# Altium PCB EST_MainV20.PcbDoc (part 6 of 8)
Units mm, origin at the board's own origin, x right, y up, seen from the top; angles counter-clockwise.
Board outline 69.72 x 115.32 mm, 2 copper layers (Top Layer, Bottom Layer); 330 components, 239 nets, 1066 pads, 416 vias.
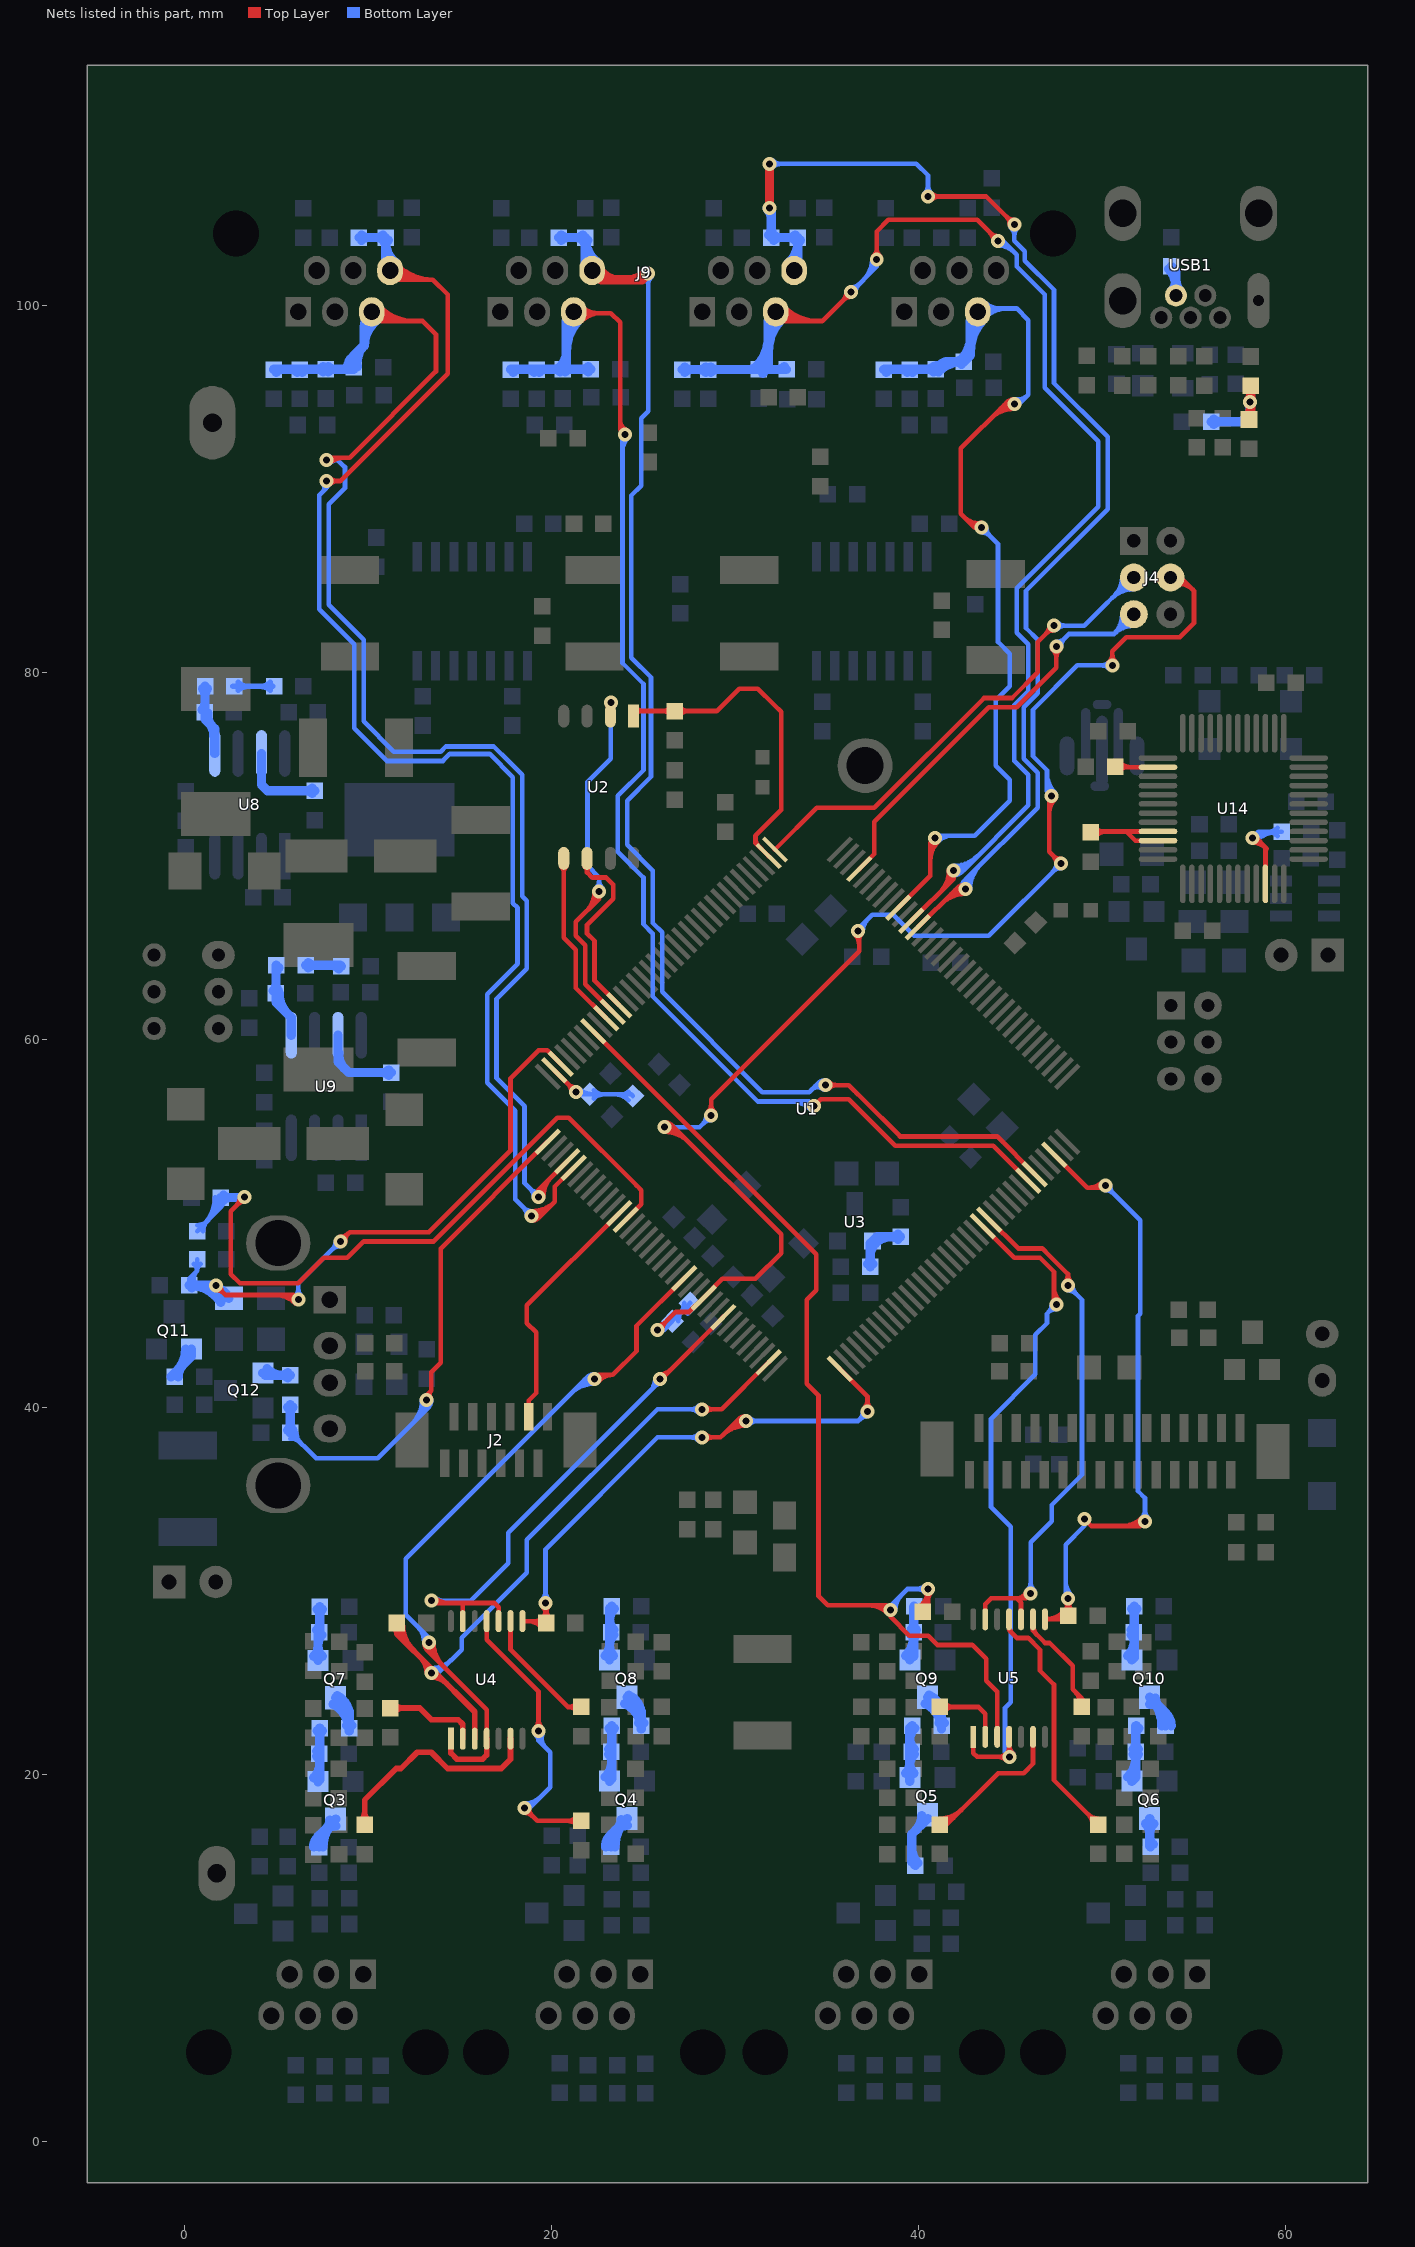
[diagram p6: the nets of this part, all layers, seen from the top]

## Via types
v1: diameter 0.762, hole 0.381, Top Layer to Bottom Layer, 258 vias
v2: diameter 1.27, hole 0.635, Top Layer to Bottom Layer, 91 vias
v3: diameter 1.016, hole 0.508, Top Layer to Bottom Layer, 66 vias
v4: diameter 1.524, hole 0.635, Top Layer to Bottom Layer, 1 vias

## Nets (pads, with @x,y where several pads share a name; then routed paths per layer and width w, separated by ;. In a path a pad name is that pad's centre, name@x,y a point inside that pad or via, vN(x,y) a via of type N, cw(c..) or ccw(c..) an arc to the next point about the centre after c; other vN are vias at no path point) (continued)
NetQ3_2: Q3.2 R13.2 R33.1 | length 5.5
  Bottom Layer w0.508: Q3.2@7.07,19.826 ccw(c6.283,20.613) 7.397,20.613 ; R13.2@7.233,20.987 cw(c6.837,20.591) 7.397,20.591 ; R13.2@7.233,21.264 ccw(c6.837,21.659) 7.397,21.659 ; R33.1@7.258,22.385 cw(c6.923,22.05) 7.397,22.05 cw(c7.87,22.05) R33.1@7.535,22.385 ; Q3.2@7.295,19.602 7.397,19.703 R33.1@7.397,22.523
NetQ3_3: Q3.3 R26.2 | length 6
  Bottom Layer w0.508: R26.2@7.059,16.045 cw(c7.841,16.045) 7.288,16.598 ; R26.2@7.233,16.184 ccw(c6.898,16.518) 7.371,16.518 ccw(c7.845,16.518) R26.2@7.51,16.184 ; R26.2@7.371,16.045 7.371,16.681 Q3.3@8.26,17.57 ; R26.2@7.567,16.045 cw(c9.575,16.045) Q3.3@8.155,17.465 ; 7.61,16.919 cw(c8.26,16.269) Q3.3@8.26,17.189 ; Q3.3@7.763,17.073 ccw(c7.329,17.506) Q3.3@7.943,17.506
NetQ4_2: Q4.2 R14.2 R34.1 | length 5.6
  Bottom Layer w0.508: Q4.2@22.94,19.859 ccw(c22.092,20.707) 23.292,20.707 ; R14.2@23.128,21.095 cw(c22.733,20.7) 23.292,20.7 ; R14.2@23.128,21.373 ccw(c22.733,21.768) 23.292,21.768 ; R34.1@23.153,22.519 cw(c22.819,22.184) 23.292,22.184 cw(c23.765,22.184) R34.1@23.43,22.519 ; Q4.2@23.165,19.634 23.292,19.761 R34.1@23.292,22.657
NetQ4_3: Q4.3 R28.2 | length 6.2
  Bottom Layer w0.508: R28.2@22.955,16.052 cw(c23.859,16.052) 23.219,16.692 ; R28.2@23.128,16.191 ccw(c22.793,16.526) 23.267,16.526 ccw(c23.74,16.526) R28.2@23.405,16.191 ; R28.2@23.267,16.052 23.267,16.739 Q4.3@24.13,17.602 ; R28.2@23.463,16.052 cw(c25.593,16.052) Q4.3@24.087,17.559 ; 23.48,16.952 cw(c24.13,16.301) Q4.3@24.13,17.221 ; Q4.3@23.633,17.105 ccw(c23.199,17.539) Q4.3@23.812,17.539
NetQ5_2: Q5.2 R15.2 R35.1 | length 6.3
  Bottom Layer w0.508: Q5.2@39.298,20.062 ccw(c38.756,20.604) 39.522,20.604 ccw(c40.289,20.604) Q5.2@39.747,20.062 ; Q5.2@39.522,19.634 39.522,22.53 R35.1@39.649,22.657 ; 39.522,20.515 cw(c40.343,20.515) R15.2@39.763,21.095 ; 39.522,21.877 cw(c40.429,21.877) R35.1@39.788,22.519 ; 39.522,21.953 ccw(c40.343,21.953) R15.2@39.763,21.373
NetQ5_3: Q5.3 R30.2 | length 4.8
  Bottom Layer w0.508: 39.624,16 ccw(c40.791,16) R30.2@39.966,15.175 ; R30.2@39.827,15.036 39.624,15.24 39.624,16.739 Q5.3@40.488,17.602 ; 39.847,16.961 ccw(c39.066,17.742) Q5.3@40.17,17.742
NetQ6_2: Q6.2 R16.2 R36.1 | length 6.2
  Bottom Layer w0.508: Q6.2@51.388,19.859 ccw(c50.355,20.892) R16.2@51.816,20.892 ; Q6.2@51.613,19.634 51.816,19.838 R16.2@51.816,21.234 51.816,22.632 R36.1@51.841,22.657 ; R16.2@51.678,21.095 cw(c51.343,20.761) 51.816,20.761 cw(c52.289,20.761) R16.2@51.955,21.095 ; R16.2@51.678,21.373 ccw(c51.343,21.707) 51.816,21.707 ccw(c52.289,21.707) R16.2@51.955,21.373 ; 51.816,22.123 cw(c52.375,22.123) R36.1@51.98,22.519
NetQ6_3: Q6.3 R32.2 | length 3.3
  Bottom Layer w0.508: Q6.3@52.353,17.314 cw(c51.811,16.772) 52.578,16.772 cw(c53.345,16.772) Q6.3@52.803,17.314 ; 52.578,16.649 ccw(c53.225,16.649) R32.2@52.768,16.191 ; Q6.3@52.578,17.602 52.578,16.103 R32.2@52.629,16.052
NetQ7_2: Q7.2 R21.1 R41.2 | length 5.9
  Bottom Layer w0.508: Q7.2@7.07,26.43 ccw(c6.528,26.972) 7.295,26.972 ccw(c8.061,26.972) Q7.2@7.519,26.43 ; R41.2@7.233,27.868 ccw(c6.837,28.263) 7.397,28.263 ; R21.1@7.258,28.989 cw(c6.923,28.654) 7.397,28.654 cw(c7.87,28.654) R21.1@7.535,28.989 ; Q7.2@7.295,26.206 7.295,27.653 R41.2@7.371,27.729 7.397,27.754 R21.1@7.397,29.127 ; 7.295,27.072 cw(c8.029,27.072) R41.2@7.51,27.591
NetQ7_3: Q7.3 R33.2 | length 7
  Bottom Layer w0.508: Q7.3@8.112,23.83 cw(c7.335,22.361) R33.2@8.997,22.361 ; Q7.3@8.26,23.793 cw(c8.26,22.873) 8.911,23.523 ; Q7.3@8.26,24.174 8.997,23.437 R33.2@8.997,22.523 ; Q7.3@8.349,24.279 cw(c7.781,23.204) 8.997,23.204 ; Q7.3@8.578,24.11 ccw(c9.191,24.11) Q7.3@8.757,23.677 ; R33.2@8.858,22.662 ccw(c8.523,22.996) 8.997,22.996 ccw(c9.47,22.996) R33.2@9.135,22.662
NetQ8_2: Q8.2 R22.1 R42.2 | length 6.2
  Bottom Layer w0.508: Q8.2@22.94,26.463 ccw(c22.398,27.005) 23.165,27.005 ccw(c23.931,27.005) Q8.2@23.389,26.463 ; Q8.2@23.165,26.238 23.165,29.033 R22.1@23.292,29.16 ; 23.165,27.017 cw(c23.986,27.017) R42.2@23.405,27.598 ; 23.165,28.38 cw(c24.072,28.38) R22.1@23.43,29.021 ; 23.165,28.455 ccw(c23.986,28.455) R42.2@23.405,27.875
NetQ8_3: Q8.3 R34.2 | length 6.9
  Bottom Layer w0.508: Q8.3@24,23.853 cw(c23.379,22.473) R34.2@24.892,22.473 ; Q8.3@24.13,23.825 cw(c24.13,22.905) 24.78,23.556 ; Q8.3@24.13,24.206 24.892,23.444 R34.2@24.892,22.657 ; Q8.3@24.208,24.316 cw(c23.732,23.259) 24.892,23.259 ; Q8.3@24.447,24.143 ccw(c25.061,24.143) Q8.3@24.627,23.709 ; R34.2@24.753,22.796 ccw(c24.419,23.13) 24.892,23.13 ccw(c25.365,23.13) R34.2@25.03,22.796
NetQ9_2: Q9.2 R23.1 R43.2 | length 6.1
  Bottom Layer w0.508: Q9.2@39.298,26.463 ccw(c38.265,27.496) R43.2@39.726,27.496 ; Q9.2@39.522,26.238 39.726,26.442 R43.2@39.726,27.736 39.726,29.134 R23.1@39.751,29.16 ; R43.2@39.587,27.598 cw(c39.253,27.263) 39.726,27.263 cw(c40.199,27.263) R43.2@39.864,27.598 ; R43.2@39.587,27.875 ccw(c39.253,28.21) 39.726,28.21 ccw(c40.199,28.21) R43.2@39.864,27.875 ; 39.726,28.626 cw(c40.285,28.626) R23.1@39.89,29.021
NetQ9_3: Q9.3 R35.2 | length 6.9
  Bottom Layer w0.508: Q9.3@40.357,23.853 cw(c39.736,22.473) R35.2@41.249,22.473 ; Q9.3@40.488,23.825 cw(c40.488,22.905) 41.138,23.556 ; Q9.3@40.488,24.206 41.249,23.444 R35.2@41.249,22.657 ; Q9.3@40.566,24.316 cw(c40.09,23.259) 41.249,23.259 ; Q9.3@40.805,24.143 ccw(c41.418,24.143) Q9.3@40.985,23.709 ; R35.2@41.111,22.796 ccw(c40.776,23.13) 41.249,23.13 ccw(c41.723,23.13) R35.2@41.388,22.796
NetQ10_2: Q10.2 R24.1 R44.2 | length 5.5
  Bottom Layer w0.508: Q10.2@51.388,26.463 ccw(c50.54,27.311) R44.2@51.74,27.311 ; R44.2@51.576,27.598 cw(c51.181,27.202) 51.74,27.202 ; R44.2@51.576,27.875 ccw(c51.181,28.27) 51.74,28.27 ; R24.1@51.601,29.021 cw(c51.267,28.686) 51.74,28.686 cw(c52.213,28.686) R24.1@51.878,29.021 ; Q10.2@51.613,26.238 51.74,26.365 R24.1@51.74,29.16
NetQ10_3: Q10.3 R36.2 | length 6.2
  Bottom Layer w0.508: Q10.3@52.578,23.825 cw(c52.578,22.905) 53.228,23.556 ; Q10.3@52.578,24.206 53.441,23.343 R36.2@53.441,22.657 ; Q10.3@52.622,24.162 cw(c51.117,22.657) R36.2@53.245,22.657 ; Q10.3@52.896,24.143 ccw(c53.509,24.143) Q10.3@53.075,23.709 ; R36.2@53.303,22.796 ccw(c52.968,23.13) 53.441,23.13 ccw(c53.915,23.13) R36.2@53.58,22.796 ; 53.489,23.295 cw(c52.851,22.657) R36.2@53.753,22.657
NetQ11_2: Q11.2 R154.2 | length 4
  Bottom Layer w0.508: R154.2@-0.711,41.656 0.406,42.773 Q11.2@0.406,43.155 ; R154.2@-0.405,41.961 ccw(c-1.599,43.155) Q11.2@0.089,43.155 ; R154.2@-0.312,41.656 cw(c0.652,41.656) -0.03,42.337
NetQ12_2: Q12.2 R157.1 | length 3.2
  Bottom Layer w0.508: Q12.2@4.293,41.859 4.42,41.732 R157.1@5.792,41.732 ; Q12.2@4.517,42.084 ccw(c5.366,42.932) R157.1@5.366,41.732 ; R157.1@5.653,41.594 ccw(c5.318,41.259) 5.318,41.732 ccw(c5.318,42.205) R157.1@5.653,41.871
NetR8_1: R8.1 R9.2 U3.1 | length 6.3
  Bottom Layer w0.508: R8.1@37.225,47.789 ccw(c36.89,48.123) 37.363,48.123 ccw(c37.837,48.123) R8.1@37.502,47.789 ; R8.1@37.363,47.65 37.363,48.92 37.719,49.276 R9.2@39.015,49.276 ; 37.363,48.25 cw(c38.288,48.25) 37.634,48.904 cw(c38.533,48.004) 38.533,49.276 ; R9.2@38.876,49.138 ccw(c38.542,48.803) 38.542,49.276 ccw(c38.542,49.749) R9.2@38.876,49.415
NetR11_2: R11.2 R12.1 U1.143 | length 9.1
  Top Layer w0.254: U1.143@20.159,58.341 v1(21.35,57.15) ; v1@21.096,57.15 ccw(c20.482,57.15) 20.916,57.584 ccw(c21.35,58.017) v1@21.35,57.404
  Bottom Layer w0.254: v1(21.35,57.15) 21.467,57.032 24.345,57.032 R12.1@24.433,56.944 ; v1@21.529,57.33 ccw(c22.247,58.047) R11.2@22.247,57.032 ; R11.2@22.311,56.804 cw(c22.862,56.253) 22.862,57.032 cw(c22.862,57.812) R11.2@22.311,57.261 ; 23.441,57.032 cw(c23.441,55.953) R12.1@24.205,56.716 ; 23.865,57.032 ccw(c23.865,57.512) R12.1@24.205,57.173
NetR65_2: R65.2 U4.6 | length 13.2
  Top Layer w0.305: R65.2@9.625,17.475 ccw(c9.117,17.983) 9.835,17.983 ccw(c10.553,17.983) R65.2@10.045,17.475 ; R65.2@9.835,17.265 9.835,18.598 11.557,20.32 11.811,20.32 12.7,21.209 13.462,21.209 14.351,20.32 14.986,20.32 17.272,20.32 17.779,20.827 U4.6@17.779,21.946
NetR66_2: R66.2 U4.11 | length 23.3
  Top Layer w0.254: U4.11@16.479,28.346 16.479,27.336 17.78,26.035 19.304,24.511 19.304,23.114 v1(19.304,22.352) ; v1@18.542,17.907 cw(c18.542,17.294) 18.976,17.727 cw(c19.409,18.161) v1@18.796,18.161 ; v1(18.542,18.161) 19.228,17.475 R66.2@21.641,17.475 ; v1@19.124,22.532 ccw(c18.691,22.965) 19.304,22.965 ccw(c19.917,22.965) v1@19.484,22.532 ; R66.2@21.413,17.247 ccw(c20.861,16.695) 20.861,17.475 ccw(c20.861,18.255) R66.2@21.413,17.703
  Bottom Layer w0.254: v1@18.542,18.415 ccw(c18.542,19.641) 19.409,18.774 ; 18.976,18.341 cw(c18.542,18.774) v1(18.542,18.161) 18.796,18.161 19.939,19.304 19.939,21.209 19.304,21.844 ; 19.422,21.726 cw(c19.821,22.125) v1(19.304,22.352) 19.304,21.844 ; v1@19.537,22.25 ccw(c20.187,21.965) 19.685,21.463 ; 19.304,21.844 cw(c19.685,21.844) 19.456,22.149 ccw(c19.685,21.844) 19.304,21.844 ; 19.304,21.844 ccw(c18.923,21.844) 19.152,22.149 cw(c18.923,21.844) 19.304,21.844
NetR67_2: R67.2 U5.6 | length 10.1
  Top Layer w0.254: R67.2@41.148,17.272 41.529,17.272 44.323,20.066 45.719,20.066 46.227,20.574 U5.6@46.227,22.047 ; R67.2@41.148,17.341 ccw(c41.148,18.426) 41.916,17.659 ; R67.2@41.148,17.595 ccw(c41.148,19.293) 42.349,18.092
NetR68_2: R68.2 U5.11 | length 15.2
  Top Layer w0.254: U5.11@44.927,28.447 44.927,27.844 45.339,27.432 45.974,27.432 46.609,26.797 46.609,25.654 47.371,24.892 47.371,19.685 R68.2@49.784,17.272 ; U5.11@44.96,28.007 ccw(c45.433,28.007) 45.098,27.673 ; R68.2@49.461,17.272 ccw(c48.682,17.272) 49.233,17.823 ccw(c49.784,18.375) R68.2@49.784,17.595
NetR78_2: R78.2 U5.9 | length 8.4
  Top Layer w0.254: U5.9@46.227,28.447 46.227,27.814 46.884,27.157 47.138,27.157 48.387,25.908 48.387,24.638 48.87,24.155 ; U5.9@46.26,28.007 ccw(c46.806,28.007) 46.42,27.621 ; 48.515,24.51 cw(c47.806,23.801) R78.2@48.802,23.681 ; R78.2@48.747,23.971 ccw(c48.671,24.155) 48.87,24.155 ; R78.2@48.87,23.673 48.87,24.155 ; 48.884,24.141 cw(c48.465,23.721) R78.2@49.054,23.65 ; R78.2@48.993,23.971 cw(c49.069,24.155) 48.87,24.155
NetR80_2: R80.2 U4.2 | length 6.2
  Top Layer w0.305: R80.2@11.232,23.615 12.827,23.615 12.834,23.615 13.462,22.987 14.925,22.987 15.179,22.733 U4.2@15.179,21.946 ; R80.2@11.442,23.404 cw(c11.95,22.896) 11.95,23.615 cw(c11.95,24.333) R80.2@11.442,23.825
NetR82_2: R82.2 U4.9 | length 7.8
  Top Layer w0.254: U4.9@17.779,28.346 17.779,26.798 20.904,23.673 ; R82.2@21.404,23.454 ccw(c20.904,22.994) 20.904,23.673 ; R82.2@21.404,23.891 cw(c20.904,24.351) 20.904,23.673 ; R82.2@21.641,23.673 20.904,23.673
NetR84_2: R84.2 U5.2 | length 5.1
  Top Layer w0.254: R84.2@41.148,23.673 43.256,23.673 43.627,23.302 U5.2@43.627,22.047 ; R84.2@41.377,23.444 cw(c41.928,22.893) 41.928,23.673 cw(c41.928,24.452) R84.2@41.377,23.901
NetR133_2: R133.2 U8.7 | length 5.5
  Bottom Layer w0.508: U8.7@4.216,75.59 4.216,73.889 4.547,73.558 R133.2@7.112,73.558 ; R133.2@6.973,73.42 ccw(c6.638,73.085) 6.638,73.558 ccw(c6.638,74.031) R133.2@6.973,73.697
NetR134_2: R134.2 U9.7 | length 6.2
  Bottom Layer w0.508: U9.7@8.382,60.249 8.382,58.801 8.966,58.217 R134.2@11.277,58.217 ; U9.7@8.433,59.279 ccw(c9.444,59.177) 8.725,58.458 ; R134.2@11.139,58.078 ccw(c10.804,57.743) 10.804,58.217 ccw(c10.804,58.69) R134.2@11.139,58.355
NetR135_1: R135.1 R136.2 | length 4.4
  Bottom Layer w0.305: R136.2@2.667,79.248 R135.1@4.826,79.248 ; R136.2@2.953,79.038 cw(c3.46,78.531) 3.46,79.248 ; R136.2@2.953,79.459 ccw(c3.462,79.968) 3.462,79.248 ; 4.183,79.248 ccw(c4.183,79.968) R135.1@4.692,79.459 ; 4.185,79.248 cw(c4.185,78.531) R135.1@4.692,79.038
NetR136_1: R136.1 R139.2 U8.5 | length 6.6
  Bottom Layer w0.508: R139.2@0.979,77.964 ccw(c0.584,78.359) 1.143,78.359 ; R136.1@1.004,79.11 cw(c0.67,78.775) 1.143,78.775 cw(c1.616,78.775) R136.1@1.282,79.11 ; R136.1@1.143,79.248 1.143,77.47 1.676,76.937 U8.5@1.676,75.59 ; R139.2@1.309,77.784 ccw(c2.038,77.629) 1.511,77.102 ; 1.32,77.293 cw(c0.583,76.556) U8.5@1.626,76.556
NetR137_1: R137.1 R138.2 | length 5.9
  Bottom Layer w0.508: R138.2@6.629,64.059 8.509,64.059 R137.1@8.56,64.008 ; R138.2@6.934,64.059 R137.1@8.382,64.059 ; 7.102,64.059 cw(c7.102,64.532) 6.768,64.198 ccw(c7.102,64.532) 7.102,64.059 ; 7.102,64.059 ccw(c7.102,63.586) 6.768,63.921 cw(c7.102,63.586) 7.102,64.059 ; 7.964,64.059 cw(c7.964,63.413) 8.421,63.87 ccw(c7.964,63.413) 7.964,64.059
NetR138_1: R138.1 R140.2 U9.5 | length 6.5
  Bottom Layer w0.508: R140.2@4.865,62.673 ccw(c4.531,63.008) 5.004,63.008 ccw(c5.477,63.008) R140.2@5.143,62.673 ; 5.004,63.525 cw(c5.563,63.525) R138.1@5.168,63.921 ; R138.1@5.029,64.059 5.004,64.034 5.004,62.052 5.842,61.214 U9.5@5.842,60.249 ; R140.2@5.2,62.522 ccw(c6.577,62.431) 5.601,61.455
NetR144_1: R144.1 R147.2 R152.2 | length 8.3
  Top Layer w0.508: R147.2@57.85,93.915 ccw(c57.272,94.493) v1@58.089,94.493 ; v1@57.949,94.652 cw(c57.611,94.314) 58.089,94.314 ; v1@57.949,94.832 ccw(c57.611,95.17) R152.2@58.089,95.17 ; R152.2@57.951,95.467 cw(c57.616,95.133) 58.089,95.133 cw(c58.563,95.133) R152.2@58.228,95.467 ; R147.2@57.989,93.878 58.089,93.979 R152.2@58.089,95.606
  Bottom Layer w0.508: R144.1@55.935,93.652 57.584,93.652 58.039,94.107 v1(58.039,94.742) ; R144.1@56.073,93.514 cw(c56.408,93.179) 56.408,93.652 cw(c56.408,94.126) R144.1@56.073,93.791 ; 57.902,93.97 ccw(c57.534,94.337) v1@57.94,94.663
NetR150_2: R150.2 USB1.4 | length 4.1
  Bottom Layer w0.508: R150.2@53.608,101.97 cw(c52.638,101) USB1.4@54.01,101 ; R150.2@53.747,102.108 54.01,101.845 USB1.4@54.01,100.527 ; USB1.4@53.765,100.771 ccw(c53.175,101.362) 54.01,101.362 ccw(c54.845,101.362) USB1.4@54.255,100.771 ; USB1.4@53.975,100.457 USB1.4@53.975,100.527
NetR165_2: R165.2 U14.26 | length 3.6
  Top Layer w0.254: R165.2@50.698,74.879 50.734,74.843 U14.26@53.033,74.843 ; R165.2@50.927,74.65 cw(c51.393,74.184) 51.393,74.843 ; R165.2@50.927,75.107 ccw(c51.563,75.744) 51.563,74.843
NetR167_1: R167.1 U14.33 U14.34 | length 6.8
  Top Layer w0.254: R167.1@49.377,71.298 49.423,71.343 51.308,71.343 ; R167.1@49.606,71.069 cw(c50.267,70.408) 50.267,71.343 ; R167.1@49.606,71.526 ccw(c50.047,71.967) 50.047,71.343 ; U14.34@53.033,70.843 51.808,70.843 51.308,71.343 ; U14.33@53.033,71.343 51.308,71.343
NetR168_1: R168.1 U14.46 | length 9.4
  Top Layer w0.254: v1@58.166,70.739 cw(c58.166,69.622) 58.956,70.412 ; 58.522,70.845 ccw(c58.166,70.489) v1(58.166,70.993) 58.375,70.993 58.883,70.485 U14.46@58.883,68.493
  Bottom Layer w0.254: v1@58.346,70.813 cw(c59.577,69.582) R168.1@59.577,71.324 ; 58.964,71.324 ccw(c58.964,70.195) v1(58.166,70.993) 58.497,71.324 R168.1@59.766,71.324 ; R168.1@59.538,71.095 ccw(c58.986,70.544) 58.986,71.324 ccw(c58.986,72.103) R168.1@59.538,71.552
PB_CON: R157.2 R160.2 U1.1 | length 34.7
  Top Layer w0.254: v1@13.018,40.45 13.462,40.894 ; v1@13.422,40.523 cw(c13.672,40.684) 13.462,40.894 ; U1.1@19.805,54.452 19.788,54.452 13.97,48.634 13.97,42.418 13.462,41.91 13.462,40.894
  Bottom Layer w0.254: R160.2@5.791,38.285 cw(c5.791,37.506) 6.342,38.057 cw(c6.894,38.608) R160.2@6.114,38.608 ; R160.2@5.791,38.608 7.188,37.211 10.541,37.211 13.208,39.878 ; 12.415,39.085 ccw(c11.114,40.386) v1@12.954,40.386 ; 12.849,39.519 ccw(c11.982,40.386) v1(13.208,40.386) 13.208,39.878 ; v1@13.056,40.183 cw(c12.827,39.878) 13.208,39.878 ; 13.282,39.952 ccw(c12.849,40.386) v1@13.462,40.386 ; v1@13.36,40.183 ccw(c13.589,39.878) 13.208,39.878
  Bottom Layer w0.508: R160.2@5.652,38.747 ccw(c5.318,39.082) 5.791,39.082 ccw(c6.264,39.082) R160.2@5.93,38.747 ; R157.2@5.653,39.994 cw(c5.32,39.66) 5.791,39.66 ; R160.2@5.791,38.608 R157.2@5.792,40.132 ; 5.791,39.658 cw(c6.266,39.658) R157.2@5.93,39.994
PB_DET: D11.1 R155.1 R158.2 U1.142 | length 43.9
  Top Layer w0.254: v1@1.728,46.38 cw(c1.728,45.767) 2.161,46.2 cw(c2.595,46.634) v1@1.982,46.634 ; v1(1.728,46.634) 2.261,46.101 5.969,46.101 v1(6.223,45.847) ccw(c5.61,45.234) 5.61,46.101 ; 4.997,46.101 cw(c4.997,44.621) v1@6.043,45.667 ; v1(8.509,49.022) 9.017,49.53 13.335,49.53 17.78,53.975 17.78,57.912 19.304,59.436 19.771,59.436 U1.142@20.512,58.694 ; v1@8.509,49.276 ccw(c8.509,49.889) 8.943,49.456 ccw(c9.376,49.022) v1@8.763,49.022
  Bottom Layer w0.254: R155.1@0.279,46.634 0.279,46.99 0.711,47.422 ; R155.1@0.343,46.66 cw(c0.762,46.832) 0.442,47.152 ; R158.2@0.521,47.795 cw(c0.25,47.422) 0.711,47.422 ; R155.1@0.578,46.757 cw(c1.144,46.989) 0.711,47.422 ; R158.2@0.711,48.056 0.711,47.422 ; R158.2@0.901,47.795 ccw(c1.173,47.422) 0.711,47.422 ; v1@6.043,46.027 ccw(c5.61,46.46) 6.223,46.46 ccw(c6.836,46.46) v1@6.403,46.027 ; v1(6.223,45.847) 6.223,46.736 v1(8.509,49.022) ; v1@8.255,49.022 cw(c7.642,49.022) 8.075,48.588 cw(c8.509,48.155) v1@8.509,48.768
  Bottom Layer w0.508: R155.1@0.418,46.495 cw(c0.753,46.161) 0.753,46.634 cw(c0.753,47.107) R155.1@0.418,46.773 ; 1.225,46.634 cw(c1.225,45.204) D11.1@2.417,45.993 ; D11.1@1.994,45.713 ccw(c0.279,44.578) R155.1@0.279,46.634 v1(1.728,46.634) D11.1@2.438,45.923
PB_VOL: R156.1 R159.2 U1.13 | length 44.5
  Top Layer w0.254: v1@3.048,51.435 cw(c2.435,51.435) 2.868,51.001 cw(c3.302,50.568) v1@3.302,51.181 ; v1(3.302,51.435) 2.54,50.673 2.54,47.244 3.048,46.736 6.223,46.736 7.62,48.133 8.89,48.133 9.779,49.022 13.589,49.022 20.32,55.753 20.955,55.753 24.638,52.07 24.892,51.816 24.892,51.053 U1.13@24.048,50.209
  Bottom Layer w0.254: R159.2@0.711,49.58 2.007,50.876 R156.1@2.007,51.409 ; R159.2@0.711,49.903 ccw(c0.711,50.683) 1.263,50.132 ccw(c1.814,49.58) R159.2@1.034,49.58 ; R159.2@1.078,49.947 ccw(c-0.384,51.409) R156.1@1.684,51.409 ; 1.511,50.38 ccw(c0.483,51.409) R156.1@1.938,51.409 ; 1.945,50.814 ccw(c1.35,51.409) R156.1@2.192,51.409
  Bottom Layer w0.508: R156.1@2.007,51.283 R156.1@2.007,51.409 3.276,51.409 v1(3.302,51.435) ; R156.1@2.145,51.271 cw(c2.48,50.936) 2.48,51.409 cw(c2.48,51.882) R156.1@2.145,51.548
RED: J2.3 U1.12 | length 14.5
  Top Layer w0.254: J2.3@18.684,40.059 ccw(c18.474,40.269) 18.771,40.269 ccw(c19.068,40.269) J2.3@18.858,40.059 ; J2.3@18.771,38.964 J2.3@18.771,39.472 18.771,40.361 19.177,40.767 19.177,44.069 18.669,44.577 18.669,45.537 U1.12@23.694,50.563
RST: C8.2 J4.4 R5.1 U1.25 | length 97.2
  Top Layer w0.254: v1(25.781,44.196) 26.768,45.183 27.507,45.183 U1.25@28.29,45.966 29.314,46.99 31.115,46.99 32.512,48.387 32.512,49.403 26.67,55.245 ; v1@25.781,44.45 ccw(c25.781,45.063) 26.215,44.63 ccw(c26.648,44.196) v1@26.035,44.196 ; v1@26.162,54.991 cw(c26.162,53.151) 27.463,54.452 ; v1@26.162,55.499 cw(c26.162,54.886) 26.596,55.319 ; v1@26.311,55.039 cw(c26.589,54.656) 26.924,54.991 ; v1@26.365,55.093 cw(c26.67,54.864) 26.67,55.245 ; v1@26.365,55.397 ccw(c26.67,55.626) 26.67,55.245 ; 26.714,55.201 ccw(c26.412,54.9) v1(26.162,55.245) ; 27.029,54.886 ccw(c26.162,54.019) v1(26.162,55.245) ; v1@28.522,56.06 ccw(c28.089,56.493) 28.702,56.493 ccw(c29.315,56.493) v1@28.882,56.06 ; v1(28.702,55.88) 28.702,56.769 36.767,64.834 v1@36.767,65.849 ; v1@36.523,65.733 cw(c35.936,65.146) 36.767,65.146 ; 36.767,65.453 cw(c37.163,65.453) v1@36.883,65.733 ; 47.117,72.359 cw(c48.164,72.359) v1@47.424,73.099 ; v1@47.117,73.152 47.117,70.231 v1(47.752,69.596) ; v1@47.498,69.596 ccw(c46.885,69.596) 47.318,70.03 ccw(c47.752,70.463) v1@47.752,69.85 ; v1@50.366,80.571 ccw(c49.933,81.004) 50.546,81.004 ccw(c51.159,81.004) v1@50.726,80.571 ; v1(50.546,80.391) 50.546,81.153 51.308,81.915 54.229,81.915 54.991,82.677 54.991,84.455 54.273,85.173 J4.4@53.714,85.173 ; J4.4@53.746,85.05 cw(c53.979,84.143) 54.641,84.805 ; J4.4@53.809,84.804 cw(c54.108,83.643) 54.956,84.49 ; v1(26.162,55.245) 26.67,55.245
  Bottom Layer w0.254: v1@25.832,44.445 ccw(c25.999,45.263) R5.1@26.59,44.673 ; v1(26.162,55.245) 28.067,55.245 v1(28.702,55.88) ; 26.256,44.339 cw(c25.886,44.709) v1(25.781,44.196) 26.114,44.196 R5.1@26.59,44.673 ; v1@26.342,55.065 cw(c26.775,54.632) 26.775,55.245 cw(c26.775,55.858) v1@26.342,55.425 ; R5.1@26.59,44.996 ccw(c26.59,45.699) 27.088,45.202 ; R5.1@26.913,44.673 cw(c27.769,44.673) 27.164,45.278 ; C8.2@27.232,45.669 cw(c26.452,45.669) 27.003,45.117 cw(c27.555,44.566) C8.2@27.555,45.346 ; 27.298,45.219 27.432,45.085 ; C8.2@27.555,45.669 26.59,44.704 R5.1@26.59,44.673 ; v1@28.448,55.88 cw(c27.835,55.88) 28.268,55.446 cw(c28.702,55.013) v1@28.702,55.626 ; v1(36.703,65.913) 36.703,66.04 37.465,66.802 38.608,66.802 39.751,65.659 43.815,65.659 v1(47.752,69.596) ; v1@36.703,66.167 ccw(c36.703,66.474) 36.92,66.257 ; v1@36.957,65.913 cw(c37.877,65.913) 37.226,66.563 ; 46.99,73.892 ccw(c47.857,73.892) v1(47.244,73.279) 46.99,73.533 46.99,74.676 46.228,75.438 46.228,77.978 48.641,80.391 v1(50.546,80.391) ; 46.99,74.505 ccw(c48.47,74.505) v1@47.424,73.459 ; v1@47.498,69.596 cw(c46.885,69.596) 47.318,69.162 cw(c47.752,68.729) v1@47.752,69.342 ; v1@50.366,80.211 ccw(c49.933,79.778) 49.933,80.391 ccw(c49.933,81.004) v1@50.366,80.571
RXINA: R74.2 U1.35 U4.3 | length 45
  Top Layer w0.254: v1(28.194,39.878) 29.273,39.878 U1.35@31.826,42.431 ; v1@28.374,39.698 cw(c28.807,39.265) 28.807,39.878 cw(c28.807,40.491) v1@28.374,40.058
  Top Layer w0.305: R74.2@11.575,28.245 ccw(c12.97,28.245) 11.984,27.259 ; R74.2@11.583,28.245 11.583,27.66 ; R74.2@11.88,28.245 ccw(c14.011,28.245) 12.504,26.739 ; 12.892,26.351 cw(c12.068,25.527) v1@13.233,25.527 ; v1@13.462,25.298 cw(c13.462,24.133) 14.286,24.957 ; v1@13.462,25.654 v1@13.525,25.717 ; U4.3@15.829,21.946 15.829,23.414 v1@13.525,25.717 ; 11.583,27.66 cw(c12.008,27.66) 11.758,28.005 ccw(c12.008,27.66) 11.583,27.66 ; 11.583,27.66 ccw(c11.157,27.66) 11.407,28.005 cw(c11.157,27.66) 11.583,27.66 ; 11.583,27.66 v1@13.525,25.717
  Bottom Layer w0.254: v1@13.462,25.781 ccw(c13.462,27.314) 14.546,26.23 ; 14.112,25.796 cw(c13.462,26.447) v1(13.462,25.527) 13.843,25.527 15.113,26.797 15.113,27.432 18.669,30.988 18.669,32.766 25.781,39.878 v1(28.194,39.878) ; v1@28.014,39.698 ccw(c27.581,39.265) 27.581,39.878 ccw(c27.581,40.491) v1@28.014,40.058
RXINA_EN: U1.22 U4.1 U4.4 | length 49.9
  Top Layer w0.254: v1@13.081,27.178 ccw(c13.694,27.178) 13.261,26.744 ; v1@13.589,27.178 ccw(c15.429,27.178) 14.128,25.877 ; 13.694,26.311 cw(c14.561,27.178) v1(13.335,27.178) 13.335,26.67 ; U4.4@16.479,21.946 16.479,23.526 13.335,26.67 ; v1@22.552,41.372 cw(c23.341,40.753) 23.341,41.756 ; 22.819,41.756 ccw(c22.819,41.163) v1(22.352,41.529) 22.579,41.756 23.341,41.756 ; U1.22@27.23,47.027 24.638,44.435 24.638,43.053 23.341,41.756 ; 13.335,26.67 cw(c13.716,26.67) 13.487,26.975 ccw(c13.716,26.67) 13.335,26.67 ; 13.335,26.67 ccw(c12.954,26.67) 13.183,26.975 cw(c12.954,26.67) 13.335,26.67
  Top Layer w0.305: U4.1@14.529,21.946 14.529,21.158 14.859,20.828 16.256,20.828 16.479,21.051 U4.4@16.479,21.946
  Bottom Layer w0.254: 12.722,28.045 cw(c11.855,27.178) v1@13.081,27.178 ; 13.155,27.612 cw(c12.722,27.178) v1(13.335,27.178) 13.335,27.432 12.065,28.702 12.065,31.75 21.844,41.529 ; 21.051,40.736 cw(c22.352,39.435) v1@22.352,41.275 ; 21.485,41.17 cw(c22.352,40.303) v1(22.352,41.529) ; 21.59,41.275 cw(c21.925,40.94) v1@22.203,41.323 ; 21.8,41.485 cw(c22.102,41.184) v1(22.352,41.529) ; 21.918,41.603 cw(c22.352,41.17) v1@22.352,41.783 ; v1@22.149,41.377 ccw(c21.844,41.148) 21.844,41.529 ; v1@22.149,41.681 cw(c21.844,41.91) 21.844,41.529 ; 21.844,41.529 v1(22.352,41.529)
RXINB: R75.2 U1.37 U4.8 | length 43
  Top Layer w0.254: U4.8@18.429,28.346 18.669,28.346 19.61,28.346 R75.2@19.711,28.245 19.711,29.311 v1(19.685,29.337) ; 18.688,28.346 cw(c18.688,27.223) R75.2@19.482,28.017 ; 19.173,28.346 ccw(c19.173,28.783) 19.482,28.474 ccw(c18.931,29.025) 19.711,29.025 ccw(c20.49,29.025) R75.2@19.939,28.474 ; v1@19.505,29.157 cw(c19.01,28.662) R75.2@19.711,28.662 ; 19.711,28.786 cw(c20.236,28.786) v1@19.865,29.157 ; v1(28.194,38.354) 29.21,38.354 30.099,39.243 ; v1@28.374,38.174 cw(c28.807,37.741) 28.807,38.354 cw(c28.807,38.967) v1@28.374,38.534 ; 29.306,38.45 cw(c30.607,37.149) v1@30.607,38.989 ; 29.74,38.884 cw(c30.607,38.017) v1(30.607,39.243) ; 29.845,38.989 cw(c30.18,38.654) v1@30.458,39.037 ; 30.055,39.199 cw(c30.357,38.898) v1(30.607,39.243) ; 30.173,39.317 cw(c30.607,38.884) v1@30.607,39.497 ; v1@30.404,39.091 ccw(c30.099,38.862) 30.099,39.243 ; v1@30.404,39.395 cw(c30.099,39.624) 30.099,39.243 ; U1.37@35.715,42.077 37.211,40.581 v1(37.211,39.751) ; v1@37.031,39.931 ccw(c36.598,40.364) 37.211,40.364 ccw(c37.824,40.364) v1@37.391,39.931 ; 30.099,39.243 v1(30.607,39.243)
  Bottom Layer w0.254: v1@19.505,29.517 ccw(c19.072,29.95) 19.685,29.95 ccw(c20.298,29.95) v1@19.865,29.517 ; v1(19.685,29.337) 19.685,32.258 25.781,38.354 v1(28.194,38.354) ; v1@28.014,38.174 ccw(c27.581,37.741) 27.581,38.354 ccw(c27.581,38.967) v1@28.014,38.534 ; v1(30.607,39.243) 36.703,39.243 v1(37.211,39.751) ; v1@30.787,39.063 cw(c31.22,38.63) 31.22,39.243 cw(c31.22,39.856) v1@30.787,39.423 ; v1@36.957,39.751 cw(c36.344,39.751) 36.777,39.317 cw(c37.211,38.884) v1@37.211,39.497
RXINB_EN: U1.28 U4.10 U4.13 | length 32.4
  Top Layer w0.254: v1(13.462,29.464) 13.589,29.337 15.179,29.337 ; v1@13.642,29.644 ccw(c14.382,30.384) 14.382,29.337 ; U4.13@15.179,28.346 15.179,29.337 ; U4.10@17.129,28.346 17.129,29.099 16.891,29.337 15.179,29.337 ; v1@25.908,41.783 ccw(c25.908,42.557) 26.455,42.01 ; v1@25.974,41.529 U1.28@29.351,44.906 ; v1@26.162,41.529 cw(c26.615,41.529) 26.295,41.849
  Bottom Layer w0.254: v1(13.462,29.464) 15.621,29.464 17.653,31.496 17.653,33.147 22.86,38.354 v1@25.908,41.402 ; v1@13.642,29.284 cw(c14.075,28.851) 14.075,29.464 cw(c14.075,30.077) v1@13.642,29.644 ; 25.385,40.879 ccw(c24.734,41.529) v1@25.654,41.529 ; 25.691,41.185 cw(c25.908,40.968) v1@25.908,41.275
  other v1: 25.908,41.529
RXINC: R76.2 U1.137 U5.3 | length 62.5
  Top Layer w0.254: U1.137@22.28,60.462 34.417,48.325 34.417,46.355 33.909,45.847 33.909,41.275 34.544,40.64 34.544,29.718 35.052,29.21 38.227,29.21 v1(38.481,28.956) ; 37.255,29.21 cw(c37.255,27.73) v1@38.301,28.776 ; 37.868,29.21 cw(c37.868,28.343) v1(38.481,28.956) ; R76.2@40.033,29.108 ccw(c39.25,30.099) v1(40.513,30.099) 40.513,29.134 R76.2@40.234,28.855 ; R76.2@40.191,28.909 ccw(c39.665,29.574) 40.513,29.574 ; v1@40.333,29.919 cw(c39.9,29.486) 40.513,29.486 cw(c41.126,29.486) v1@40.693,29.919 ; U5.3@44.277,22.047 44.277,24.511 43.688,25.1 43.688,26.289 42.926,27.051 41.021,27.051 40.513,27.559 39.497,27.559 38.481,28.575 v1(38.481,28.956)
  Bottom Layer w0.254: 38.643,29.346 ccw(c39.033,28.956) v1(38.481,28.956) 38.481,29.185 39.395,30.099 v1(40.513,30.099) ; v1@38.735,28.956 cw(c39.9,28.956) 39.076,29.78 ; v1@40.333,29.919 ccw(c39.9,29.486) 39.9,30.099 ccw(c39.9,30.712) v1@40.333,30.279
RXINC_EN: U1.59 U5.1 U5.4 | length 43.6
  Top Layer w0.254: U5.1@42.977,22.047 42.977,21.158 43.18,20.955 44.704,20.955 v1@44.927,21.178 ; U1.59@43.493,49.855 45.216,48.133 46.609,48.133 47.371,47.371 47.371,45.72 v1(47.498,45.593) ; v1@44.778,20.775 ccw(c44.345,20.342) 44.345,20.955 ccw(c44.345,21.568) 44.778,21.135 ccw(c44.42,21.493) U5.4@44.927,21.493 ; U5.4@44.927,21.644 ccw(c45.647,21.644) v1@45.138,21.135 ; U5.4@44.927,22.047 v1@44.927,21.178 ; v1@45.085,20.828 v1(44.958,20.955) 44.927,20.986 v1@44.927,21.178 ; 47.371,46.513 ccw(c48.418,46.513) v1@47.678,45.773
  Bottom Layer w0.254: 44.704,21.568 ccw(c45.571,21.568) v1(44.958,20.955) ; 44.704,22.181 ccw(c46.184,22.181) v1@45.138,21.135 ; v1@45.085,20.828 v1(44.958,20.955) ; v1@47.244,45.593 cw(c46.631,45.593) 47.064,45.159 cw(c47.498,44.726) v1@47.498,45.339 ; v1(47.498,45.593) 46.99,45.085 46.99,44.577 46.355,43.942 46.355,41.783 43.942,39.37 43.942,34.544 45.009,33.477 45.009,23.927 44.704,23.622 44.704,21.209 v1(44.958,20.955)
RXIND: R73.2 U1.70 U5.8 | length 42.8
  Top Layer w0.254: U5.8@46.877,28.447 48.058,28.447 R73.2@48.159,28.347 ; U5.8@46.885,28.447 ccw(c46.885,29.925) 47.93,28.88 ccw(c47.441,29.37) v1@48.133,29.37 ; U1.70@47.382,53.745 49.184,51.943 v1@50.292,51.943 ; 47.499,28.447 ccw(c47.499,29.312) R73.2@48.11,28.7 ; v1@47.953,29.411 cw(c47.52,28.978) 48.133,28.978 cw(c48.746,28.978) v1@48.313,29.411 ; v1@48.133,29.493 ccw(c49,29.493) R73.2@48.387,28.88 ; v1(48.133,29.591) 48.133,28.677 R73.2@48.159,28.652 ; v1(49.022,33.909) 49.403,33.528 52.07,33.528 v1(52.324,33.782) cw(c51.711,34.395) 51.711,33.528 ; 49.245,51.943 ccw(c49.245,52.99) v1@49.985,52.25 ; 51.098,33.528 ccw(c51.098,35.008) v1@52.144,33.962
  Bottom Layer w0.254: 48.006,30.511 ccw(c49.053,30.511) v1@48.313,29.771 ; v1(48.133,29.591) 48.006,29.718 48.006,32.512 49.022,33.528 v1(49.022,33.909) ; v1@50.165,51.816 cw(c50.165,51.203) 50.599,51.636 cw(c51.032,52.07) v1@50.419,52.07 ; v1@50.292,51.943 52.07,50.165 52.07,45.085 51.943,44.958 51.943,35.433 52.324,35.052 v1(52.324,33.782) ; v1@52.144,33.962 ccw(c51.711,34.395) 52.324,34.395 ccw(c52.937,34.395) v1@52.504,33.962
  other v1: 50.165,52.07
RXIND_EN: U1.60 U5.10 U5.13 | length 33.4
  Top Layer w0.254: U5.13@43.627,28.447 43.627,29.276 43.942,29.591 45.339,29.591 ; U1.60@43.847,50.209 45.415,48.641 46.736,48.641 46.99,48.387 ; U5.10@45.577,28.447 45.577,29.353 45.339,29.591 ; 45.72,29.591 ccw(c45.72,30.004) v1(46.101,29.845) 45.847,29.591 45.339,29.591 ; v1@45.867,29.943 cw(c45.339,30.162) 45.339,29.591 ; 46.863,48.514 46.99,48.387 ; v1@47.953,46.789 ccw(c47.52,47.222) 48.133,47.222 ccw(c48.746,47.222) v1@48.313,46.789 ; v1(48.133,46.609) 48.133,47.244 46.99,48.387
  Bottom Layer w0.254: v1@45.921,30.025 ccw(c45.488,30.458) 46.101,30.458 ccw(c46.714,30.458) v1@46.281,30.025 ; v1(46.101,29.845) 46.101,32.639 47.244,33.782 47.244,34.671 48.895,36.322 48.895,45.847 v1(48.133,46.609) ; v1@48.133,46.355 cw(c48.133,45.742) 48.567,46.175 cw(c49,46.609) v1@48.387,46.609
SPI0_CLK: U1.133 U2.6 | length 11
  Top Layer w0.254: U2.6@21.823,69.428 cw(c21.528,69.133) 21.946,69.133 cw(c22.363,69.133) U2.6@22.068,69.428 ; U2.6@21.946,69.875 21.946,69.113 22.225,68.834 22.987,68.834 23.368,68.453 23.368,67.691 21.946,66.269 21.946,65.786 22.352,65.38 22.352,63.219 U1.133@23.694,61.876
SPI0_CS: R7.1 U1.110 U2.1 | length 21
  Top Layer w0.254: U2.1@24.486,77.622 24.765,77.902 26.111,77.902 ; U2.1@24.608,77.825 cw(c24.793,77.64) 24.793,77.902 ; U2.1@24.608,78.07 ccw(c25.013,78.475) 25.013,77.902 ; R7.1@26.453,77.72 ccw(c26.111,77.488) 26.111,77.902 ; R7.1@26.453,78.083 cw(c26.111,78.316) 26.111,77.902 ; R7.1@26.949,77.673 cw(c27.5,77.122) 27.5,77.902 cw(c27.5,78.682) R7.1@26.949,78.13 ; 31.115,70.952 ccw(c31.676,70.952) U1.110@31.279,70.555 ; U1.110@31.826,70.008 31.115,70.719 31.115,71.12 32.512,72.517 32.512,77.851 32.131,78.232 31.242,79.121 30.226,79.121 29.007,77.902 26.111,77.902
SPI0_DI: U1.134 U2.2 | length 25.1
  Top Layer w0.254: 21.903,66.988 ccw(c20.819,68.072) v1@22.352,68.072 ; 22.337,67.422 ccw(c21.686,68.072) v1(22.606,68.072) 22.606,67.691 21.336,66.421 21.336,65.659 21.844,65.151 21.844,63.019 U1.134@23.341,61.523 ; U2.2@23.061,78.179 cw(c22.689,77.807) U2.2@23.216,77.807 ; U2.2@23.1,78.076 ccw(c22.871,78.334) v1@23.216,78.334 ; U2.2@23.216,77.622 v1@23.216,78.334 ; U2.2@23.216,77.684 cw(c23.916,77.684) v1@23.421,78.179 ; v1(23.241,78.359) v1@23.216,78.334 ; U2.2@23.331,78.076 cw(c23.56,78.334) v1@23.216,78.334
  Bottom Layer w0.254: v1@22.426,68.252 ccw(c21.993,68.685) 22.606,68.685 ccw(c23.219,68.685) v1@22.786,68.252 ; v1(22.606,68.072) 22.606,68.834 21.971,69.469 21.971,74.041 23.241,75.311 v1(23.241,78.359) ; v1@23.061,78.179 cw(c22.628,77.746) 23.241,77.746 cw(c23.854,77.746) v1@23.421,78.179
SPI0_DO: U1.135 U2.5 | length 10.3
  Top Layer w0.254: U2.5@20.553,69.428 cw(c20.258,69.133) 20.676,69.133 cw(c21.093,69.133) U2.5@20.798,69.428 ; U2.5@20.676,69.875 20.676,65.557 21.336,64.897 21.336,62.82 U1.135@22.987,61.169
SWCLK: J4.3 U1.109 | length 32.4
  Top Layer w0.254: U1.109@32.18,70.362 34.462,72.644 37.592,72.644 43.561,78.613 45.085,78.613 46.482,80.01 46.482,81.661 v1(47.371,82.55) ; v1@47.117,82.55 cw(c46.504,82.55) 46.937,82.116 cw(c47.371,81.683) v1@47.371,82.296
  Bottom Layer w0.254: v1(47.371,82.55) 49.022,82.55 51.645,85.173 J4.3@51.714,85.173 ; v1@47.551,82.37 cw(c47.984,81.937) 47.984,82.55 cw(c47.984,83.163) v1@47.551,82.73 ; 50.512,84.04 cw(c51.714,82.837) J4.3@51.714,84.538 ; 50.68,84.208 ccw(c49.714,85.173) J4.3@51.079,85.173 ; 50.945,84.473 cw(c51.714,83.704) J4.3@51.714,84.792 ; 51.113,84.641 ccw(c50.582,85.173) J4.3@51.333,85.173
SWDIO: J4.5 U1.105 | length 28.1
  Top Layer w0.254: U1.105@36.776,69.301 37.592,70.117 37.592,71.882 43.815,78.105 45.339,78.105 47.498,80.264 v1(47.498,81.407) ; v1@47.318,81.227 cw(c46.885,80.794) 47.498,80.794 cw(c48.111,80.794) v1@47.678,81.227
  Bottom Layer w0.254: v1(47.498,81.407) 48.184,82.093 50.634,82.093 ; v1@47.498,81.661 ccw(c47.498,82.274) 47.932,81.841 ccw(c48.365,81.407) v1@47.752,81.407 ; J4.5@51.079,83.171 cw(c49.56,83.167) 50.634,82.093 ; J4.5@51.333,83.172 cw(c50.422,83.169) 51.066,82.525 cw(c51.711,81.88) J4.5@51.713,82.792 ; J4.5@51.713,82.538 ccw(c51.709,81.019) 50.634,82.093 ; J4.5@51.714,83.173 50.634,82.093
TACHOA0: J9.5 R97.1 R99.1 R101.2 R102.2 U1.4 | length 94.2
  Top Layer w0.254: v1@7.747,91.694 9.017,91.694 13.716,96.393 13.716,98.425 13.005,99.136 10.721,99.136 J9.5@10.221,99.636 ; v1@7.927,91.387 cw(c8.667,90.647) 8.667,91.694 ; J9.5@10.267,99.582 ccw(c11.344,100.658) 11.344,99.136 ; J9.5@10.447,99.761 ccw(c11.957,101.272) 11.957,99.136 ; J9.5@10.626,99.941 ccw(c12.57,101.885) 12.57,99.136 ; v1@19.558,51.435 cw(c21.123,51.435) 20.016,52.541 ; 19.583,52.108 ccw(c20.256,51.435) v1(19.304,51.435) 19.304,51.829 U1.4@20.866,53.391
  Bottom Layer w0.254: v1(7.747,91.567) 8.382,91.567 8.763,91.186 8.763,90.043 7.874,89.154 7.874,83.693 9.779,81.788 9.779,77.343 11.43,75.692 13.97,75.692 14.249,75.971 16.866,75.971 17.653,75.184 ; v1@7.927,91.387 cw(c8.36,90.954) 8.36,91.567 cw(c8.36,92.18) v1@7.927,91.747 ; 17.78,75.057 17.653,75.184 ; 18.415,67.945 18.415,68.072 ; v1@19.05,51.435 ccw(c18.437,51.435) 18.87,51.869 ccw(c19.304,52.302) v1@19.304,51.689 ; v1(19.304,51.435) 18.542,52.197 18.542,56.388 17.018,57.912 17.018,62.23 18.669,63.881 18.669,67.564 18.415,67.818 18.415,68.072 ; 17.653,75.184 18.415,74.422 18.415,68.072
  Bottom Layer w0.508: R97.1@4.877,96.495 4.902,96.52 R102.2@7.721,96.52 9.246,96.52 R101.2@9.246,96.621 9.246,97.257 9.819,97.83 ; R97.1@5.016,96.356 cw(c5.411,95.961) 5.411,96.52 ; 5.766,96.52 cw(c5.766,95.961) R99.1@6.161,96.356 ; R99.1@6.438,96.356 cw(c6.834,95.961) 6.834,96.52 ; R102.2@7.583,96.381 ccw(c7.248,96.047) 7.248,96.52 ccw(c7.248,96.993) R102.2@7.583,96.658 ; R102.2@7.86,96.381 cw(c8.194,96.047) 8.194,96.52 ; R102.2@7.86,96.658 ccw(c8.195,96.993) 8.195,96.52 ; 8.527,96.52 ccw(c8.527,97.34) 9.107,96.76 ccw(c8.773,97.094) 9.246,97.094 ccw(c9.719,97.094) R101.2@9.384,96.76 ; R101.2@8.938,96.571 cw(c9.572,96.674) 9.118,97.129 ; R101.2@9.439,96.653 cw(c10.778,96.871) 9.819,97.83 ; 9.819,97.783 cw(c11.608,97.783) J9.5@10.498,99.186 ; 9.819,98.639 cw(c10.272,98.639) J9.5@10.246,99.09 ; 9.819,98.833 cw(c10.777,98.833) J9.5@10.183,99.584 ; J9.5@10.221,99.136 9.819,98.734 9.819,97.83
TACHOA1: J9.6 R111.1 R113.2 U1.5 | length 90.2
  Top Layer w0.254: v1(7.747,90.424) 8.509,90.424 14.351,96.266 14.351,100.584 13.545,101.39 J9.6@10.819,101.39 ; v1@7.927,90.244 cw(c8.36,89.811) 8.36,90.424 cw(c8.36,91.037) v1@7.927,90.604 ; J9.6@11.267,101.835 ccw(c12.332,102.884) 12.332,101.39 ; J9.6@11.448,102.014 ccw(c12.938,103.481) 12.938,101.39 ; J9.6@11.629,102.192 ccw(c13.545,104.079) 13.545,101.39 ; v1@18.918,50.165 ccw(c18.93,50.76) 19.351,50.339 ; v1@18.928,50.673 ccw(c18.966,52.408) 20.193,51.181 ; v1@19.126,50.267 cw(c19.431,50.038) 19.431,50.419 ; v1@19.126,50.571 ccw(c19.431,50.8) 19.431,50.419 ; 19.772,50.76 cw(c18.948,51.584) v1(18.923,50.419) 19.431,50.419 ; U1.5@21.219,53.037 20.193,52.011 20.193,51.181 ; 19.431,50.419 20.193,51.181
  Bottom Layer w0.254: 7.557,89.853 ccw(c7.355,90.054) v1@7.562,90.25 ; 7.741,90.037 ccw(c7.545,90.234) v1(7.747,90.424) 7.747,90.043 7.366,89.662 7.366,83.439 9.271,81.534 9.271,76.962 11.049,75.184 12.954,75.184 ; 13.589,75.184 12.954,75.184 ; 16.51,75.565 16.002,75.565 ; v1@18.669,50.419 ccw(c18.056,50.419) 18.489,50.853 ccw(c18.923,51.286) v1@18.923,50.673 ; v1(18.923,50.419) 18.034,51.308 18.034,56.134 16.51,57.658 16.51,62.484 18.161,64.135 18.161,67.183 17.907,67.437 17.907,74.295 16.637,75.565 16.002,75.565 ; 12.954,75.184 14.097,75.184 14.478,75.565 16.002,75.565
  Bottom Layer w0.508: R111.1@9.525,103.682 R113.2@10.973,103.683 ; R111.1@9.664,103.544 cw(c9.998,103.209) 9.998,103.682 cw(c9.998,104.156) R111.1@9.664,103.821 ; 10.499,103.682 ccw(c10.499,104.158) R113.2@10.835,103.822 ; 10.501,103.682 cw(c10.501,103.211) 10.835,103.544 cw(c10.501,103.211) 10.973,103.211 ; 10.973,103.208 cw(c11.448,103.208) R113.2@11.112,103.544 ; J9.6@11.221,101.89 10.973,102.138 10.973,103.428 ccw(c12.364,103.428) J9.6@11.498,102.339
TACHOB0: J9.11 R98.1 R100.1 R103.2 R104.2 U1.66 | length 89.7
  Top Layer w0.254: J9.11@20.819,99.136 21.251,99.568 23.241,99.568 23.749,99.06 23.749,93.726 ; J9.11@21.447,99.31 cw(c22.069,98.688) 22.069,99.568 ; J9.11@21.626,99.131 cw(c22.682,98.074) 22.682,99.568 ; J9.11@21.626,99.941 ccw(c22.526,100.841) 22.526,99.568 ; v1(34.29,56.388) 34.671,56.769 36.195,56.769 38.735,54.229 44.069,54.229 U1.66@45.968,52.33 ; v1@23.749,93.218 v1(24.003,92.964) ; v1@23.749,93.218 23.749,93.726 ; v1@23.749,93.218 23.749,93.726 ; 23.749,93.726 ccw(c24.32,93.726) 24.101,93.198 cw(c24.32,93.726) 23.749,93.726 ; v1(24.003,92.964) cw(c24.162,93.345) 23.749,93.345 ccw(c24.162,93.345) v1(24.003,92.964)
  Bottom Layer w0.254: 23.876,92.044 cw(c24.923,92.044) v1@24.183,92.784 ; v1(24.003,92.964) 23.876,92.837 23.876,80.518 25.019,79.375 25.019,74.676 23.622,73.279 23.622,70.231 25.019,68.834 25.019,66.294 25.527,65.786 25.527,62.357 31.242,56.642 34.036,56.642 v1(34.29,56.388) ccw(c33.677,55.775) 33.677,56.642 ; 33.064,56.642 cw(c33.064,55.162) v1@34.11,56.208
  Bottom Layer w0.508: R98.1@17.78,96.495 17.805,96.52 R103.2@22.149,96.52 ; R98.1@17.919,96.356 cw(c18.314,95.961) 18.314,96.52 ; 18.669,96.52 cw(c18.669,95.961) R100.1@19.064,96.356 ; R100.1@19.341,96.356 cw(c19.736,95.961) 19.736,96.52 ; R104.2@20.486,96.381 ccw(c20.151,96.047) 20.151,96.52 ccw(c20.151,96.993) 20.486,96.658 ccw(c19.681,97.463) 20.819,97.463 ; R104.2@20.624,96.52 20.819,96.714 J9.11@20.819,99.136 ; R104.2@20.763,96.381 cw(c21.098,96.047) 21.098,96.52 cw(c21.098,96.993) R104.2@20.763,96.658 ; 20.819,97.488 cw(c23.268,97.488) J9.11@21.536,99.22 ; 20.819,98.715 cw(c22.042,98.715) J9.11@21.177,99.58 ; R103.2@22.01,96.381 ccw(c21.676,96.046) 21.676,96.52 ccw(c21.676,96.993) R103.2@22.01,96.658
TACHOB1: J9.12 R112.1 R114.2 U1.67 | length 86.2
  Top Layer w0.254: v1(34.925,57.531) 36.195,57.531 36.894,56.832 ; v1@35.105,57.351 cw(c35.538,56.918) 35.538,57.531 cw(c35.538,58.144) v1@35.105,57.711 ; 36.576,57.15 36.894,56.832 ; U1.67@46.322,52.684 44.269,54.737 38.989,54.737 36.894,56.832
  Top Layer w0.508: J9.12@22.221,101.89 22.721,101.39 23.622,101.39 ; J9.12@22.616,101.997 ccw(c23.622,102.527) 23.622,101.39 ; 24.152,101.39 ccw(c24.152,102.848) v1@25.183,101.817 ; 24.213,101.39 23.622,101.39 ; v1(25.273,101.727) 24.936,101.39 23.622,101.39
  Bottom Layer w0.254: v1@25.093,101.547 cw(c24.66,101.114) 25.273,101.114 cw(c25.886,101.114) v1@25.453,101.547 ; v1(25.273,101.727) 25.273,94.234 24.892,93.853 24.892,90.17 24.359,89.637 24.359,80.797 25.425,79.731 25.425,74.32 24.13,73.025 24.13,70.612 25.527,69.215 25.527,67.945 ; 25.527,68.072 25.527,67.945 ; 34.15,57.264 cw(c34.811,56.603) v1(34.925,57.531) ; 34.163,57.277 cw(c34.498,56.942) v1@34.776,57.325 ; 34.373,57.487 cw(c34.675,57.186) v1(34.925,57.531) ; 34.518,57.632 cw(c34.892,57.259) v1@34.956,57.783 ; v1@34.722,57.379 ccw(c34.417,57.15) 34.417,57.531 ; v1@34.722,57.683 cw(c34.417,57.912) 34.417,57.531 ; 25.527,67.945 25.527,66.361 26.035,65.853 26.035,62.611 31.496,57.15 34.036,57.15 34.417,57.531 ; 34.417,57.531 v1(34.925,57.531)
  Bottom Layer w0.508: R112.1@20.396,103.682 R114.2@21.844,103.683 R114.2@21.819,103.658 ; R112.1@20.535,103.544 cw(c20.869,103.209) 20.869,103.682 cw(c20.869,104.156) R112.1@20.535,103.821 ; 21.37,103.682 ccw(c21.37,104.158) R114.2@21.706,103.822 ; 21.373,103.682 cw(c21.373,103.211) 21.706,103.544 cw(c21.371,103.21) 21.844,103.21 cw(c22.318,103.21) R114.2@21.983,103.544 ; 21.844,102.637 ccw(c22.73,102.637) J9.12@22.183,101.941 ; J9.12@22.221,101.89 21.844,102.266 R114.2@21.844,103.683 ccw(c23.552,103.683) J9.12@22.497,102.34
TACHOC0: J9.17 R115.1 R117.1 R119.2 R120.2 U1.97 | length 96.4
  Top Layer w0.254: J9.17@32.221,99.136 34.747,99.136 v1(36.322,100.711) ; J9.17@32.267,99.582 ccw(c33.344,100.658) 33.344,99.136 ; J9.17@32.447,99.761 ccw(c33.957,101.272) 33.957,99.136 ; J9.17@32.626,99.941 ccw(c34.57,101.885) 34.57,99.136 ; v1@36.068,100.711 cw(c35.455,100.711) 35.888,100.277 cw(c36.322,99.844) v1@36.322,100.457 ; v1@37.539,102.669 ccw(c37.106,103.102) 37.719,103.102 ccw(c38.332,103.102) v1@37.899,102.669 ; v1(37.719,102.489) 37.719,104.013 38.354,104.648 43.18,104.648 v1(44.323,103.505) ; U1.97@39.604,66.472 41.91,68.778 v1(41.91,69.215) cw(c40.856,69.215) 41.601,68.469 ; 41.168,68.036 ccw(c39.988,69.215) v1@41.656,69.215 ; v1@44.069,103.505 ccw(c43.456,103.505) 43.889,103.939 ccw(c44.323,104.372) v1@44.323,103.759
  Bottom Layer w0.254: v1(36.322,100.711) 37.719,102.108 v1(37.719,102.489) cw(c36.799,102.489) 37.45,101.839 ; v1@36.322,100.965 ccw(c36.322,101.578) 36.756,101.145 ccw(c37.189,100.711) v1@36.576,100.711 ; 37.016,101.405 ccw(c35.932,102.489) v1@37.465,102.489 ; v1@41.91,68.961 ccw(c41.91,69.574) 42.344,69.141 ; v1@41.91,69.469 ccw(c41.91,71.309) 43.211,70.008 ; v1@42.113,69.063 cw(c42.418,68.834) 42.418,69.215 ; v1@42.113,69.367 ccw(c42.418,69.596) 42.418,69.215 ; 42.777,69.574 cw(c41.91,70.441) v1(41.91,69.215) 42.418,69.215 ; v1@44.323,103.251 cw(c44.323,102.025) 45.19,102.892 ; 44.757,103.325 ccw(c44.323,102.892) v1(44.323,103.505) 44.577,103.505 45.339,102.743 45.339,102.108 46.863,100.584 46.863,95.504 49.784,92.583 49.784,89.027 45.339,84.582 45.339,82.169 45.974,81.534 45.974,78.994 45.212,78.232 45.212,75.184 45.974,74.422 45.974,72.771 42.418,69.215
  Bottom Layer w0.508: R115.1@27.128,96.495 R117.1@28.55,96.495 R119.2@32.792,96.495 ; R115.1@27.266,96.356 cw(c27.601,96.021) 27.601,96.495 cw(c27.601,96.968) R115.1@27.266,96.633 ; R117.1@28.411,96.356 ccw(c28.077,96.021) 28.077,96.495 ccw(c28.077,96.968) R117.1@28.411,96.633 ; R117.1@28.689,96.356 cw(c29.023,96.021) 29.023,96.495 cw(c29.023,96.968) R117.1@28.689,96.633 ; 30.758,96.495 ccw(c30.758,97.054) 31.154,96.658 ccw(c29.548,98.264) 31.819,98.264 ; R120.2@31.431,96.658 ccw(c31.826,97.054) 31.826,96.495 ; R120.2@31.513,96.299 ccw(c30.774,97.038) 31.819,97.038 ; 31.819,96.553 J9.17@31.819,99.136 ; 31.819,97.488 cw(c34.268,97.488) J9.17@32.536,99.22 ; 31.819,98.715 cw(c33.042,98.715) J9.17@32.177,99.58 ; 32.283,96.495 ccw(c32.283,97.053) R119.2@32.678,96.658
TACHOC1: J9.18 R129.1 R131.2 U1.96 | length 86.8
  Top Layer w0.254: U1.96@39.958,66.119 42.038,68.199 ; v1(40.513,105.918) 43.688,105.918 v1(45.212,104.394) ; v1@40.693,105.738 cw(c41.126,105.305) 41.126,105.918 cw(c41.126,106.531) v1@40.693,106.098 ; 41.246,67.407 cw(c42.545,66.107) v1@42.545,67.945 ; 41.679,67.84 cw(c42.545,66.975) v1(42.545,68.199) ; 41.784,67.945 cw(c42.118,67.612) v1@42.396,67.994 ; 41.995,68.156 cw(c42.295,67.855) v1(42.545,68.199) ; 42.113,68.274 cw(c42.545,67.842) v1@42.545,68.453 ; v1@42.342,68.047 ccw(c42.038,67.82) 42.038,68.199 ; v1@42.342,68.351 cw(c42.038,68.578) 42.038,68.199 ; v1@44.958,104.394 ccw(c44.345,104.394) 44.778,104.828 ccw(c45.212,105.261) v1@45.212,104.648 ; 42.038,68.199 v1(42.545,68.199)
  Top Layer w0.508: v1(31.877,105.283) v1(31.877,107.696)
  Bottom Layer w0.254: v1(31.877,107.696) 39.878,107.696 40.513,107.061 v1(40.513,105.918) ; v1@32.057,107.516 cw(c32.49,107.083) 32.49,107.696 cw(c32.49,108.309) v1@32.057,107.876 ; v1@40.333,106.098 ccw(c39.9,106.531) 40.513,106.531 ccw(c41.126,106.531) v1@40.693,106.098 ; v1@42.291,68.199 cw(c42.904,68.199) 42.471,68.633 ; v1@42.393,68.402 ccw(c42.164,68.707) 42.545,68.707 ; v1@42.697,68.402 cw(c42.926,68.707) 42.545,68.707 ; v1@42.799,68.199 cw(c44.639,68.199) 43.338,69.5 ; 42.904,69.066 ccw(c43.771,68.199) v1(42.545,68.199) 42.545,68.707 ; v1@45.032,104.214 cw(c44.599,103.781) 45.212,103.781 cw(c45.825,103.781) v1@45.392,104.214 ; v1(45.212,104.394) 45.212,103.505 45.784,102.933 45.784,102.425 47.371,100.838 47.371,95.758 50.292,92.837 50.292,92.456 ; 50.292,92.777 50.292,92.456 ; 42.545,68.707 46.482,72.644 46.482,74.549 45.72,75.311 45.72,78.105 46.482,78.867 46.482,81.788 45.847,82.423 45.847,84.455 50.292,88.9 50.292,92.456
  Bottom Layer w0.508: v1@31.75,105.283 31.979,105.054 R129.1@31.979,103.682 ; v1@31.787,105.193 cw(c31.325,104.731) 31.979,104.731 ; R129.1@31.84,103.821 ccw(c31.505,104.156) 31.979,104.156 ccw(c32.452,104.156) 32.117,103.821 ccw(c32.45,104.154) 32.45,103.683 ; R129.1@31.979,103.682 R131.2@33.427,103.683 ; R129.1@32.117,103.544 cw(c32.453,103.208) 32.453,103.683 ; J9.18@32.927,102.325 ccw(c31.958,103.429) 33.427,103.429 J9.18@33.427,101.998 ; R131.2@33.288,103.822 cw(c32.954,104.156) 32.954,103.683 cw(c32.954,103.21) 33.288,103.544 cw(c32.954,103.21) 33.427,103.21 cw(c33.9,103.21) R131.2@33.565,103.544
TACHOD0: J9.23 R116.1 R118.1 R121.2 R122.2 U1.99 | length 74.5
  Top Layer w0.254: U1.99@38.897,67.18 40.64,68.922 40.64,70.739 v1(40.894,70.993) ccw(c41.507,70.38) 40.64,70.38 ; 40.64,69.767 cw(c42.12,69.767) v1@41.074,70.813 ; 42.482,88.455 ccw(c43.271,89.245) v1@43.404,88.136 ; 42.851,88.086 ccw(c43.35,88.585) v1(43.434,87.884) 43.053,87.884 42.291,88.646 42.291,92.202 44.704,94.615 ; 43.911,93.822 cw(c45.212,92.521) v1@45.212,94.361 ; 44.345,94.256 cw(c45.212,93.389) v1(45.212,94.615) ; 44.45,94.361 cw(c44.785,94.026) v1@45.063,94.409 ; 44.66,94.571 cw(c44.962,94.27) v1(45.212,94.615) ; 44.778,94.689 cw(c45.212,94.256) v1@45.212,94.869 ; v1@45.009,94.463 ccw(c44.704,94.234) 44.704,94.615 ; v1@45.009,94.767 cw(c44.704,94.996) 44.704,94.615 ; 44.704,94.615 v1(45.212,94.615)
  Bottom Layer w0.254: v1(40.894,70.993) 41.021,71.12 43.053,71.12 44.958,73.025 44.958,74.168 44.196,74.93 44.196,75.311 ; v1@41.074,70.813 cw(c41.814,70.073) 41.814,71.12 ; J9.23@42.819,99.136 43.505,99.822 45.339,99.822 45.974,99.187 45.974,95.123 ; v1@43.434,87.63 cw(c43.434,87.017) 43.868,87.45 cw(c44.301,87.884) v1@43.688,87.884 ; v1(43.434,87.884) 44.323,86.995 44.323,81.661 44.958,81.026 44.958,79.248 44.196,78.486 44.196,75.311 ; J9.23@43.447,99.51 cw(c44.199,98.757) 44.199,99.822 ; J9.23@43.626,99.331 cw(c44.813,98.144) 44.813,99.822 ; J9.23@43.626,100.141 ccw(c44.396,100.911) 44.396,99.822 ; 44.196,75.184 44.196,75.311 ; v1@45.241,94.867 ccw(c45.343,95.754) 45.974,95.123 ; 45.602,94.751 cw(c45.266,95.087) v1(45.212,94.615) 45.466,94.615 45.974,95.123
  Bottom Layer w0.508: R116.1@38.1,96.495 38.125,96.52 R122.2@40.944,96.52 41.148,96.52 41.554,96.926 ; R116.1@38.239,96.356 cw(c38.634,95.961) 38.634,96.52 ; 38.989,96.52 cw(c38.989,95.961) R118.1@39.384,96.356 ; R118.1@39.661,96.356 cw(c40.056,95.961) 40.056,96.52 ; R122.2@40.806,96.381 ccw(c40.472,96.047) 40.472,96.52 ccw(c40.471,96.993) R122.2@40.806,96.658 ; R122.2@40.964,96.715 ccw(c41.036,97.444) 41.554,96.926 ; R122.2@41.083,96.381 cw(c42.398,95.066) R121.2@42.398,96.926 ; R122.2@41.14,96.517 cw(c41.554,96.512) 41.554,96.926 ; R121.2@42.33,96.787 ccw(c41.996,96.453) 41.996,96.926 ccw(c41.996,97.399) 42.33,97.065 ccw(c41.151,98.244) 42.819,98.244 ; 42.819,97.488 cw(c45.268,97.488) J9.23@43.536,99.22 ; 42.819,98.715 cw(c44.042,98.715) J9.23@43.177,99.58 ; J9.23@42.819,99.136 42.819,97.276 R121.2@42.469,96.926 41.554,96.926